# Altium PCB PCB_interplaque_jetsonV1PcbDoc.PcbDoc
Units mm, origin at the board's own origin, x right, y up, seen from the top; angles counter-clockwise.
Board outline 41.02 x 18.67 mm, 2 copper layers (Top Layer, Bottom Layer); 8 components, 20 nets, 56 pads, 20 vias.
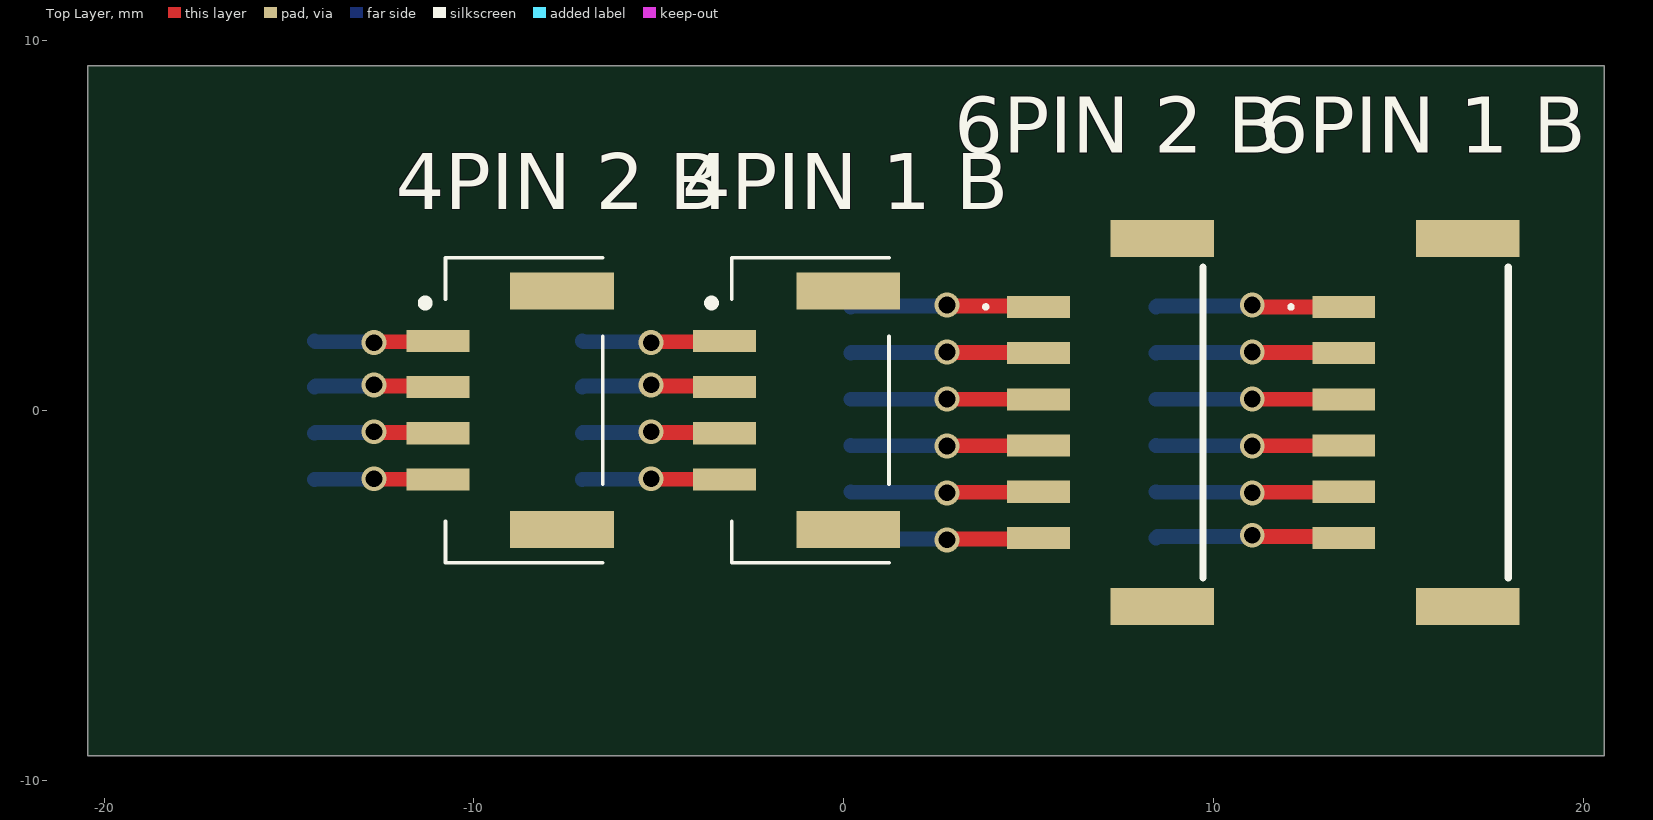
[diagram p0: Top Layer view]
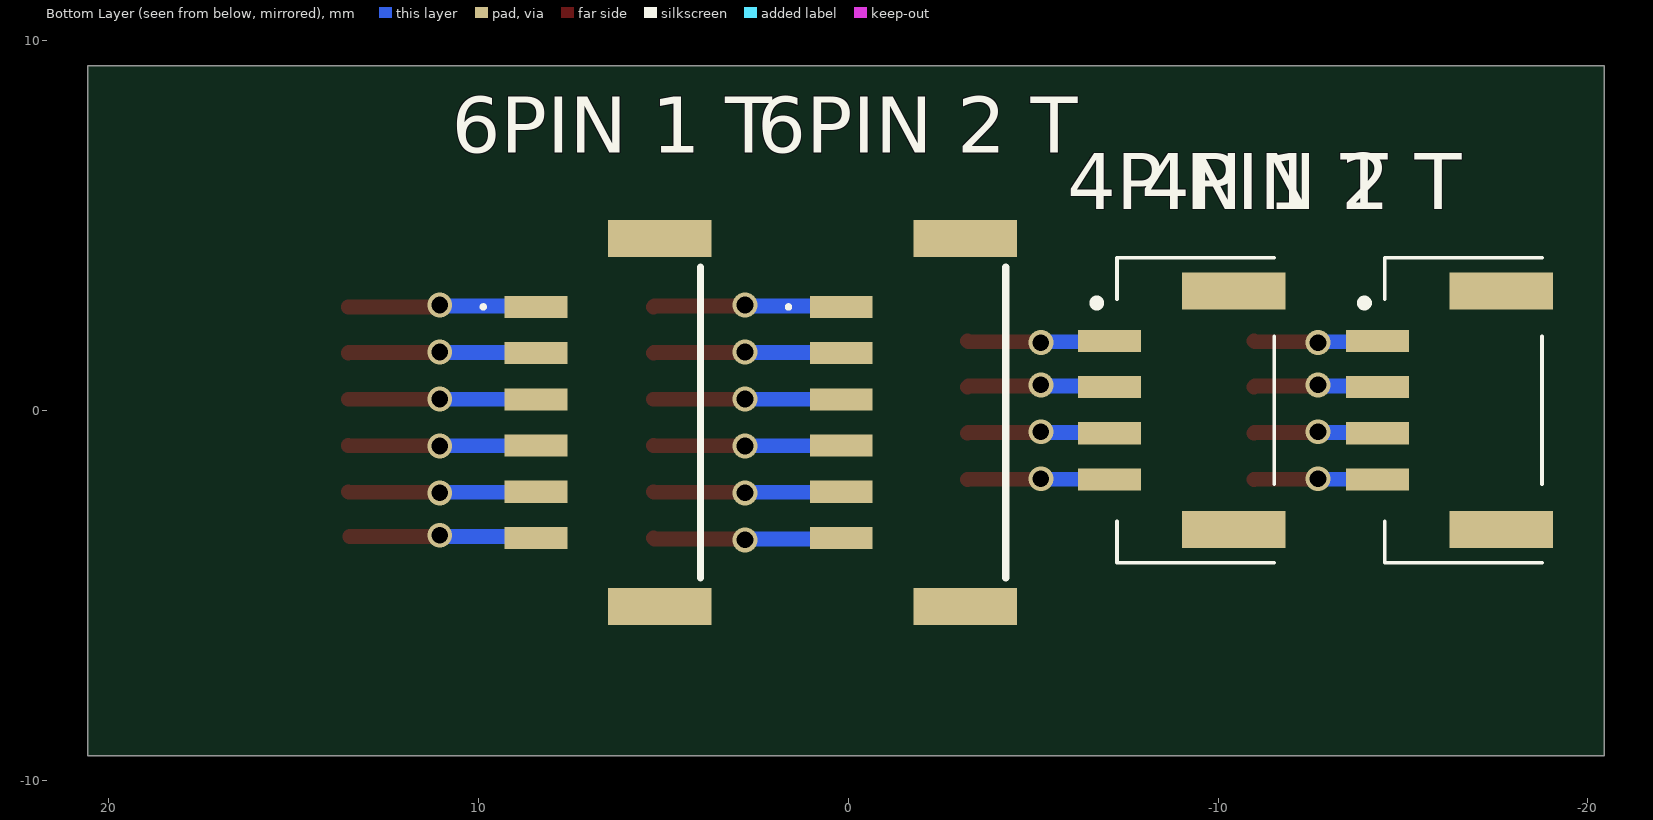
[diagram p1: Bottom Layer view, seen from below]
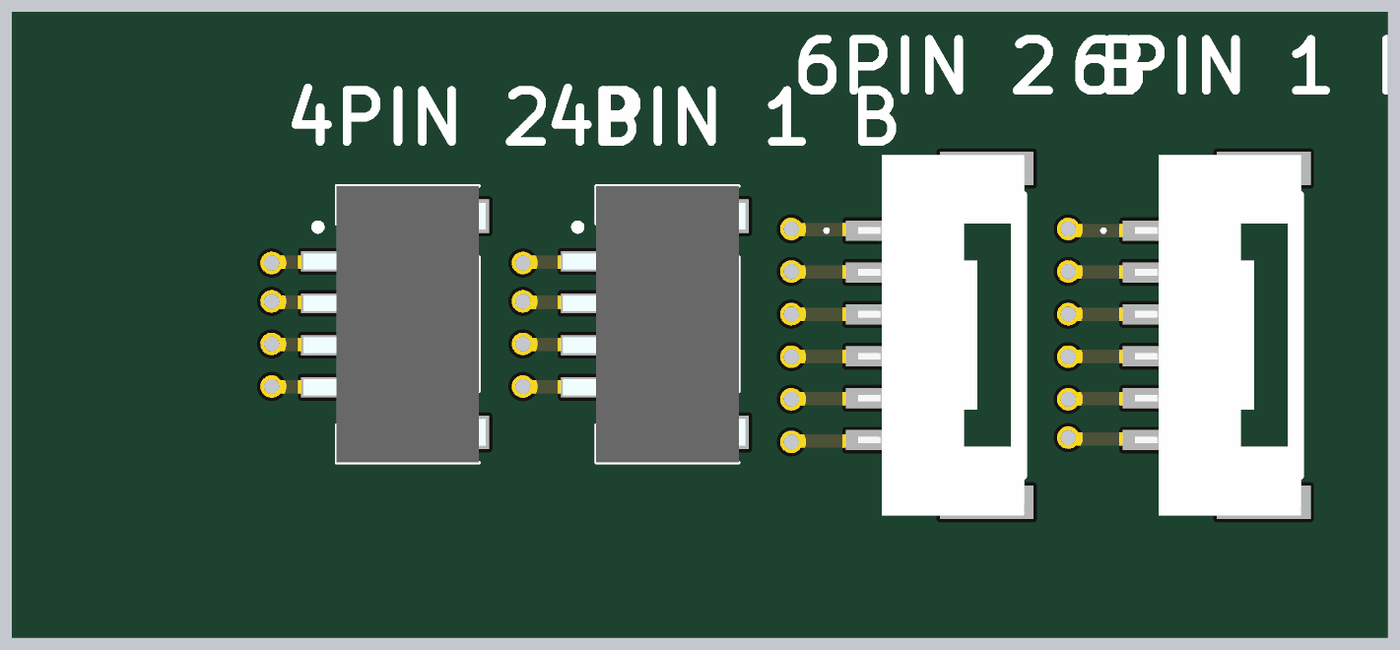
[diagram p2: 3D render of the assembled board from above, using the file's embedded part models]
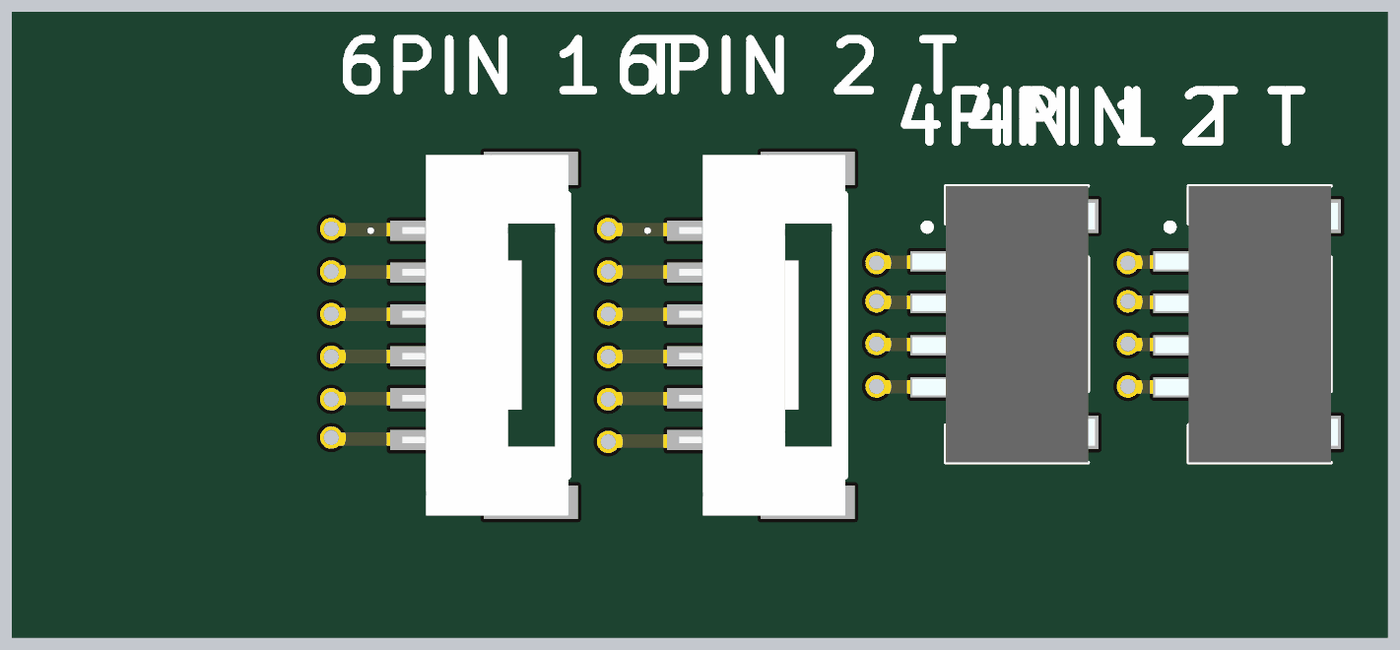
[diagram p3: 3D render of the assembled board from below, using the file's embedded part models]

## Layer stack, top to bottom
Top Solder: solder mask 0.0102, Solder Resist, Dk 3.5
Top Layer: signal copper 0.0356
Dielectric 1: dielectric 0.32, FR-4, Dk 4.8
Bottom Layer: signal copper 0.0356
Bottom Solder: solder mask 0.0102, Solder Resist, Dk 3.5

## Board outline
-20.447,-9.335 20.574,-9.335 20.574,9.335 -20.447,9.335

## Design rules (kind name [scope] priority, off if disabled: settings)
Clearance [All] p1: gap=0.254 ignorepadtopadclearanceinfootprint=FALSE
PolygonConnect [All] p1: connectstyle=Relief reliefconductorwidth=0.254 reliefentries=4 polygonreliefangle="90 Angle" airgapwidth=0.254
RoutingVias [All] p1: holewidth=0.711 width=1.27 viastyle="Through Hole" minholewidth=0.711 minwidth=1.27 maxholewidth=0.711 maxwidth=1.27
SolderMaskExpansion [All] p1: expansion=0.102 istentingtop=FALSE
Width [All] p1: maxlimit=0.7 minlimit=0.4 preferedwidth=0.4
30 further rules are at their usual default settings.

## Components (designator, comment, footprint, x,y, rotation, side; value= is the part's Value field where it differs from the comment)
"4PIN 1 B" "BM04B-GHS-TBT_LF__SN__N_" BM04BGHSTBTLFSNN -1.273,0.014 r90 top
"4PIN 1 T" "BM04B-GHS-TBT_LF__SN__N_" BM04BGHSTBTLFSNN -9.017,0.014 r90 bottom
"4PIN 2 B" "BM04B-GHS-TBT_LF__SN__N_" BM04BGHSTBTLFSNN -9.017,0.014 r90 top
"4PIN 2 T" "BM04B-GHS-TBT_LF__SN__N_" BM04BGHSTBTLFSNN -16.256,0.014 r90 bottom
"6PIN 1 B" "BM06B-GHS-TBT_LF__SN_" BM06BGHSTBTLFSN 15.748,-0.318 r90 top
"6PIN 1 T" "BM06B-GHS-TBT_LF__SN_" BM06BGHSTBTLFSN 6.223,-0.318 r90 bottom
"6PIN 2 B" "BM06B-GHS-TBT_LF__SN_" BM06BGHSTBTLFSN 7.493,-0.318 r90 top
"6PIN 2 T" "BM06B-GHS-TBT_LF__SN_" BM06BGHSTBTLFSN -2.032,-0.318 r90 bottom

## Footprints (in the part's own frame and the unit in brackets; to place one, negate y for a bottom-side part, rotate by r counter-clockwise, add the part's x,y. Pads: shape width x height; smd on the part's side, far side on the other; paste and mask are expansions set on the pad)
BM04BGHSTBTLFSNN [mm]
  rect 0.6x1.7 smd: 1(1.875,1.95) 2(0.625,1.95) 3(-0.625,1.95) 4(-1.875,1.95)
  rect 1x2.8 smd: MP1(3.225,-1.4) MP2(-3.225,-1.4)
  silkscreen extent -4.13,-2.5 4.13,2.4, body extent -4.13,-2.7 4.13,2.74, height 4.15
BM06BGHSTBTLFSN [mm]
  rect 0.6x1.7 smd: 1(3.125,2.225) 2(1.875,2.225) 3(0.625,2.225) 4(-0.625,2.225) 5(-1.875,2.225) 6(-3.125,2.225)
  rect 1x2.8 smd: MP1(4.975,-1.125) MP2(-4.975,-1.125)
  silkscreen extent -4.2,-2.22 4.2,3.7, body extent -5.37,-2.24 5.38,2.71, height 4.21

## Part data
"4PIN 1 B" "4PIN 1 T" "4PIN 2 B" "4PIN 2 T": "Connector", Arrow Part Number=BM04B-GHS-TBT(LF)(SN)(N), Manufacturer_Name="JST (JAPAN SOLDERLESS TERMINALS)", Mouser Part Number=N/A, Arrow Price/Stock=https://www.arrow.com/en/products/bm04b-ghs-tbt-lf-sn-n/jst-manufacturing?region=europe, Datasheet Link=http://www.jst-mfg.com/product/pdf/eng/eGH.pdf, Height=4.05mm, Manufacturer_Part_Number=BM04B-GHS-TBT(LF)(SN)(N), Mouser Price/Stock=https://www.mouser.co.uk/ProductDetail/JST-Commercial/BM04B-GHS-TBTLFSNN?qs=QpmGXVUTftGHKxacCgPJ1g%3D%3D
"6PIN 1 B" "6PIN 1 T" "6PIN 2 B" "6PIN 2 T": "Connector", Manufacturer_Name="JST (JAPAN SOLDERLESS TERMINALS)", Manufacturer_Part_Number=BM06B-GHS-TBT(LF)(SN), Mouser Part Number=306-BM06BGHSTBTLFSNN, Datasheet Link=https://datasheet.lcsc.com/szlcsc/2004111131_JST-Sales-America-BM06B-GHS-TBT-LF-SN_C495534.pdf, Height=4.05mm, Mouser Price/Stock=https://www.mouser.co.uk/ProductDetail/JST-Commercial/BM06B-GHS-TBTLFSN?qs=cdbOS8ANM9CObKjnhD04mw%3D%3D

## Via types
v1: diameter 0.67, hole 0.45, Top Layer to Bottom Layer, 20 vias

## Nets (pads, with @x,y where several pads share a name; then routed paths per layer and width w, separated by ;. In a path a pad name is that pad's centre, name@x,y a point inside that pad or via, vN(x,y) a via of type N, cw(c..) or ccw(c..) an arc to the next point about the centre after c; other vN are vias at no path point)
"Net4PIN 1 B_1": "4PIN 1 B.1" "4PIN 1 T.1" | length 3.9
  Top Layer w0.4: v1(-5.207,1.841) -5.183,1.865 -3.247,1.865 -3.223,1.889
  Bottom Layer w0.4: -7.067,1.889 -7.043,1.865 -5.231,1.865 v1(-5.207,1.841)
"Net4PIN 1 B_2": "4PIN 1 B.2" "4PIN 1 T.2" | length 3.9
  Top Layer w0.4: v1(-5.207,0.699) -5.177,0.669 -3.253,0.669 -3.223,0.639
  Bottom Layer w0.4: -7.067,0.639 -7.037,0.669 -5.237,0.669 v1(-5.207,0.699)
"Net4PIN 1 B_3": "4PIN 1 B.3" "4PIN 1 T.3" | length 3.9
  Top Layer w0.4: v1(-5.207,-0.572) -5.187,-0.591 -3.243,-0.591 -3.223,-0.611
  Bottom Layer w0.4: -7.067,-0.611 -7.047,-0.591 -5.227,-0.591 v1(-5.207,-0.572)
"Net4PIN 1 B_4": "4PIN 1 B.4" "4PIN 1 T.4" | length 3.9
  Top Layer w0.4: v1(-5.207,-1.841) -5.197,-1.851 -3.233,-1.851 -3.223,-1.861
  Bottom Layer w0.4: -7.067,-1.861 -7.057,-1.851 -5.217,-1.851 v1(-5.207,-1.841)
"Net4PIN 2 B_1": "4PIN 2 B.1" "4PIN 2 T.1" | length 3.4
  Top Layer w0.4: v1(-12.7,1.841) -12.676,1.865 -10.991,1.865 -10.967,1.889
  Bottom Layer w0.4: -14.306,1.889 -14.282,1.865 -12.724,1.865 v1(-12.7,1.841)
"Net4PIN 2 B_2": "4PIN 2 B.2" "4PIN 2 T.2" | length 3.4
  Top Layer w0.4: v1(-12.7,0.699) -12.67,0.669 -10.997,0.669 -10.967,0.639
  Bottom Layer w0.4: -14.306,0.639 -14.276,0.669 -12.73,0.669 v1(-12.7,0.699)
"Net4PIN 2 B_3": "4PIN 2 B.3" "4PIN 2 T.3" | length 3.4
  Top Layer w0.4: v1(-12.7,-0.572) -12.68,-0.591 -10.987,-0.591 -10.967,-0.611
  Bottom Layer w0.4: -14.306,-0.611 -14.286,-0.591 -12.72,-0.591 v1(-12.7,-0.572)
"Net4PIN 2 B_4": "4PIN 2 B.4" "4PIN 2 T.4" | length 3.4
  Top Layer w0.4: v1(-12.7,-1.841) -12.69,-1.851 -10.977,-1.851 -10.967,-1.861
  Bottom Layer w0.4: -14.306,-1.861 -14.296,-1.851 -12.71,-1.851 v1(-12.7,-1.841)
"Net6PIN 1 B_1": "6PIN 1 B.1" "6PIN 1 T.1" | length 5.1
  Top Layer w0.4: v1(11.049,2.857) 11.099,2.808 13.523,2.808
  Bottom Layer w0.4: 8.448,2.808 8.473,2.832 11.024,2.832 v1(11.049,2.857)
"Net6PIN 1 B_2": "6PIN 1 B.2" "6PIN 1 T.2" | length 5.1
  Top Layer w0.4: v1(11.049,1.587) 11.064,1.572 13.508,1.572 13.523,1.558
  Bottom Layer w0.4: 8.448,1.558 8.463,1.572 11.034,1.572 v1(11.049,1.587)
"Net6PIN 1 B_3": "6PIN 1 B.3" "6PIN 1 T.3" | length 5.1
  Top Layer w0.4: v1(11.049,0.318) 11.054,0.312 13.518,0.312 13.523,0.308
  Bottom Layer w0.4: 8.448,0.308 8.453,0.312 11.044,0.312 v1(11.049,0.318)
"Net6PIN 1 B_4": "6PIN 1 B.4" "6PIN 1 T.4" | length 5.1
  Top Layer w0.4: v1(11.049,-0.953) 11.054,-0.947 13.518,-0.947 13.523,-0.943
  Bottom Layer w0.4: 8.448,-0.943 8.453,-0.947 11.044,-0.947 v1(11.049,-0.953)
"Net6PIN 1 B_5": "6PIN 1 B.5" "6PIN 1 T.5" | length 5.1
  Top Layer w0.4: v1(11.049,-2.222) 11.064,-2.207 13.508,-2.207 13.523,-2.193
  Bottom Layer w0.4: 8.448,-2.193 8.463,-2.207 11.034,-2.207 v1(11.049,-2.222)
"Net6PIN 1 B_6": "6PIN 1 B.6" "6PIN 1 T.6" | length 5.1
  Top Layer w0.254: 13.484,-3.404 13.523,-3.443
  Top Layer w0.4: v1@11.087,-3.404 13.484,-3.404
  Bottom Layer w0.4: 8.448,-3.443 8.487,-3.404 11.011,-3.404 v1(11.049,-3.365)
"Net6PIN 2 B_1": "6PIN 2 B.1" "6PIN 2 T.1" | length 5.1
  Top Layer w0.4: v1(2.794,2.857) 2.819,2.832 5.243,2.832 5.268,2.808
  Bottom Layer w0.4: 0.193,2.808 0.218,2.832 2.769,2.832 v1(2.794,2.857)
"Net6PIN 2 B_2": "6PIN 2 B.2" "6PIN 2 T.2" | length 5.1
  Top Layer w0.4: v1(2.794,1.587) 2.809,1.572 5.253,1.572 5.268,1.558
  Bottom Layer w0.4: 0.193,1.558 0.208,1.572 2.779,1.572 v1(2.794,1.587)
"Net6PIN 2 B_3": "6PIN 2 B.3" "6PIN 2 T.3" | length 5.1
  Top Layer w0.4: v1(2.794,0.318) 2.799,0.312 5.263,0.312 5.268,0.308
  Bottom Layer w0.4: 0.193,0.308 0.198,0.312 2.789,0.312 v1(2.794,0.318)
"Net6PIN 2 B_4": "6PIN 2 B.4" "6PIN 2 T.4" | length 5.1
  Top Layer w0.4: v1(2.794,-0.953) 2.799,-0.947 5.263,-0.947 5.268,-0.943
  Bottom Layer w0.4: 0.193,-0.943 0.198,-0.947 2.789,-0.947 v1(2.794,-0.953)
"Net6PIN 2 B_5": "6PIN 2 B.5" "6PIN 2 T.5" | length 5.1
  Top Layer w0.4: v1(2.794,-2.222) 2.809,-2.207 5.253,-2.207 5.268,-2.193
  Bottom Layer w0.4: 0.193,-2.193 0.208,-2.207 2.779,-2.207 v1(2.794,-2.222)
"Net6PIN 2 B_6": "6PIN 2 B.6" "6PIN 2 T.6" | length 5.1
  Top Layer w0.4: v1(2.794,-3.492) 2.819,-3.467 5.243,-3.467 5.268,-3.443
  Bottom Layer w0.4: 0.193,-3.443 0.218,-3.467 2.769,-3.467 v1(2.794,-3.492)
pads on no net: "4PIN 1 B.MP1" "4PIN 1 B.MP2" "4PIN 1 T.MP1" "4PIN 1 T.MP2" "4PIN 2 B.MP1" "4PIN 2 B.MP2" "4PIN 2 T.MP1" "4PIN 2 T.MP2" "6PIN 1 B.MP1" "6PIN 1 B.MP2" "6PIN 1 T.MP1" "6PIN 1 T.MP2" "6PIN 2 B.MP1" "6PIN 2 B.MP2" "6PIN 2 T.MP1" "6PIN 2 T.MP2"